# Altium PCB PCI_ASTROPIX_carrier_Bondplan.PcbDoc (part 1 of 2)
Units mm, origin at the board's own origin, x right, y up, seen from the top; angles counter-clockwise.
Board outline 51.3 x 59.63 mm, 4 copper layers (Top Layer, gnd, HV_vss, Bottom Layer); 70 components, 63 nets, 532 pads, 96 vias.
Unrouted connection lines stored in the file: 4.
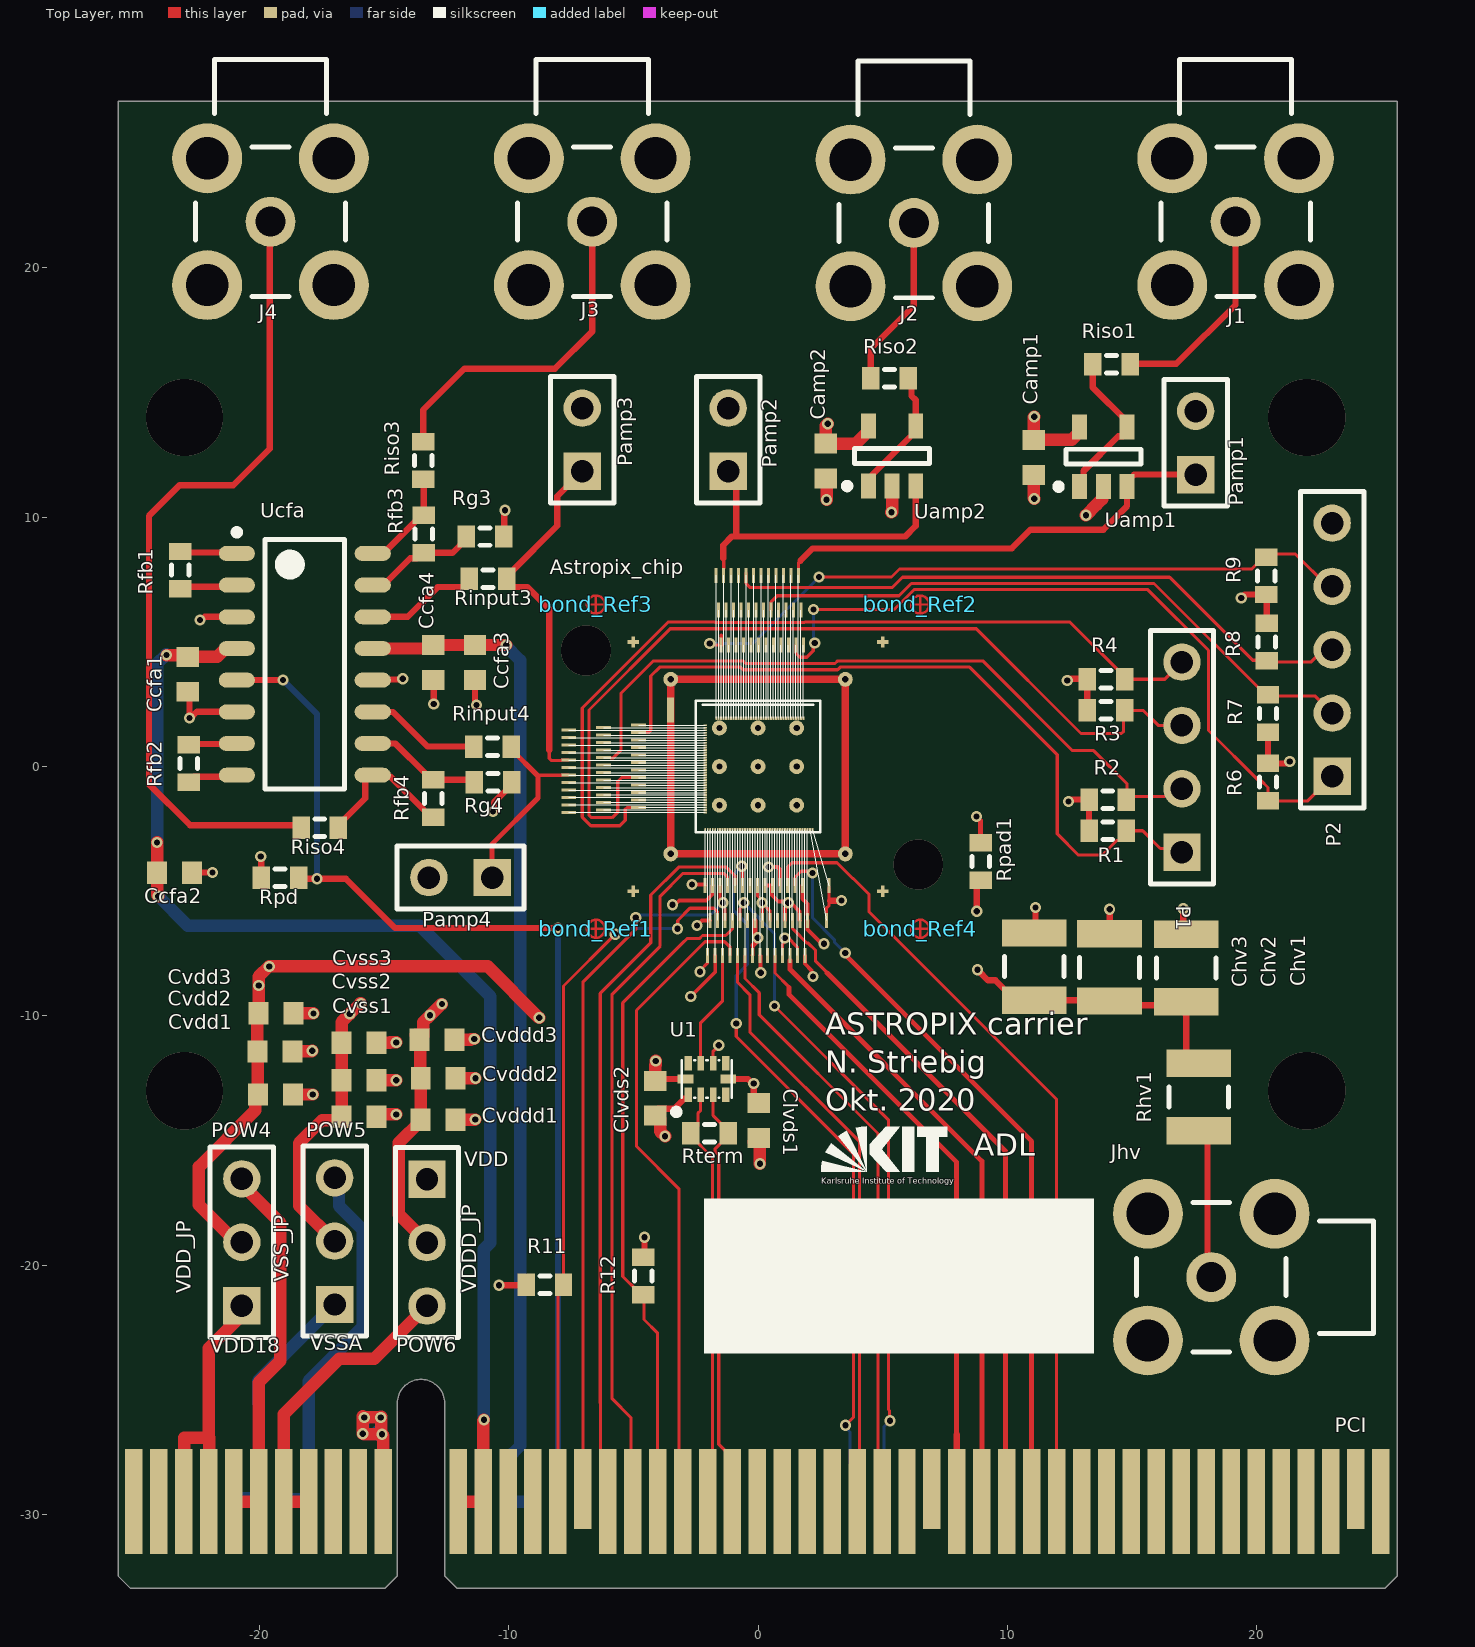
[diagram p0: Top Layer view]
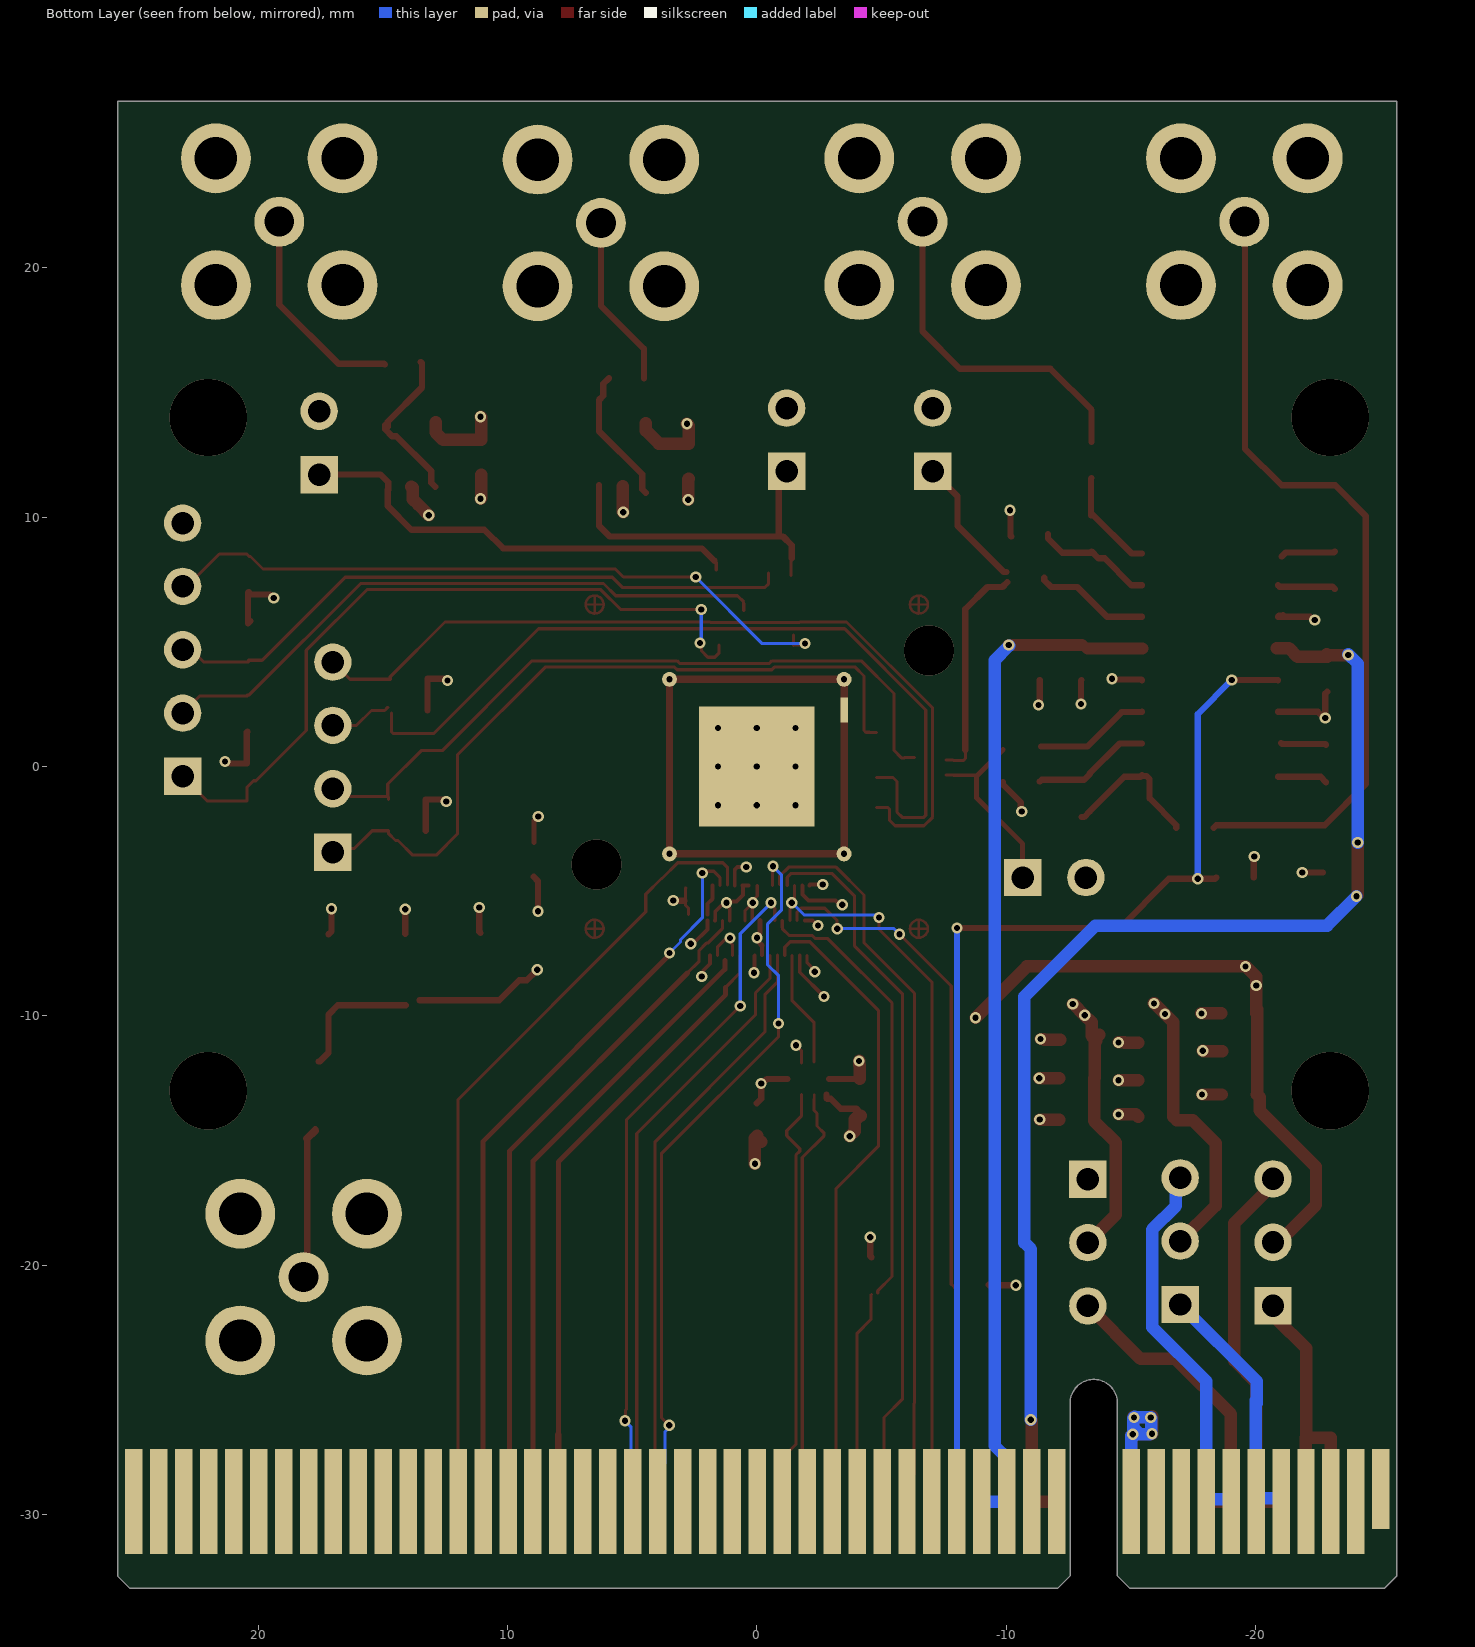
[diagram p1: Bottom Layer view, seen from below]
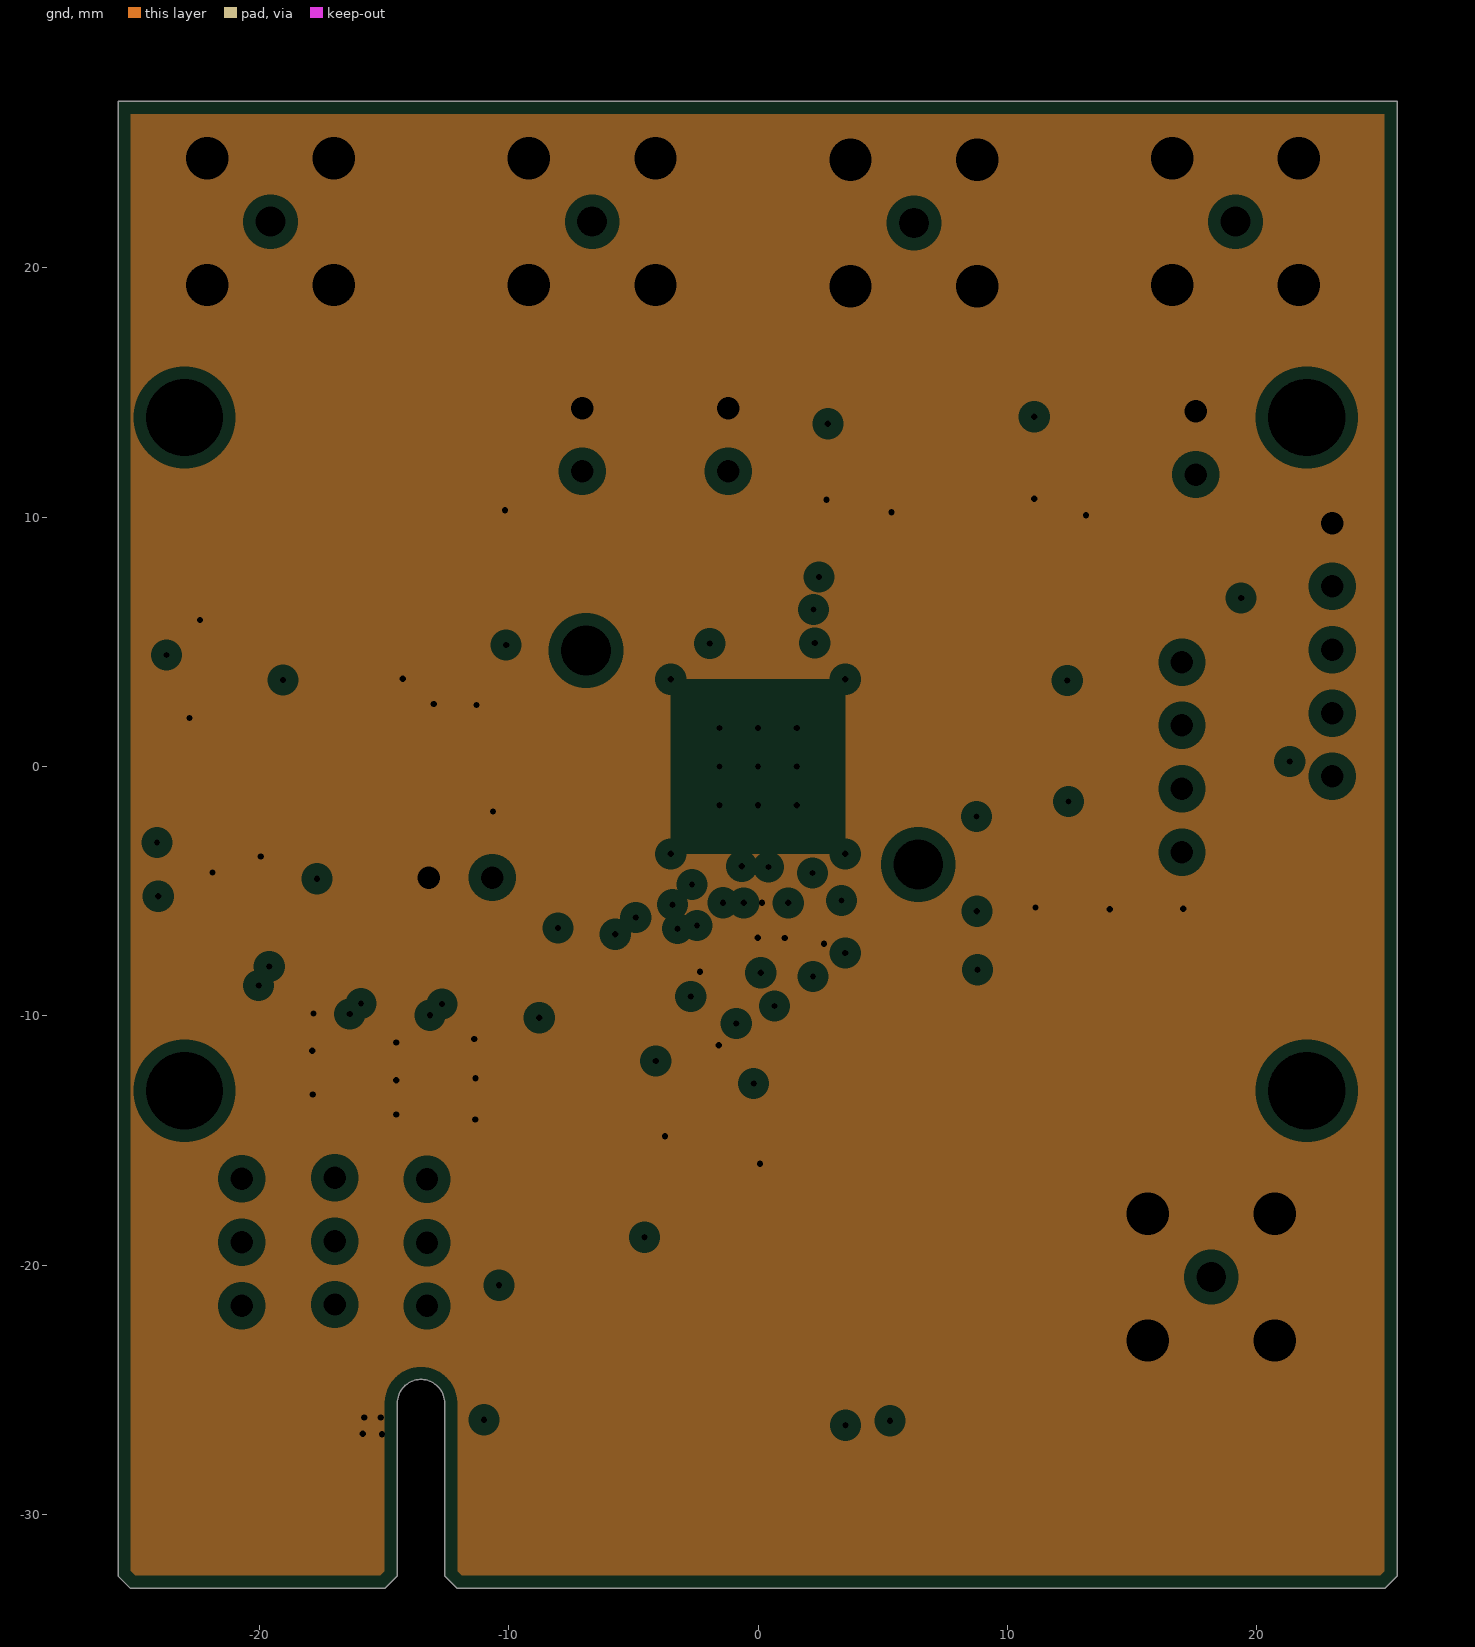
[diagram p2: gnd, clearances drawn from the general rule]
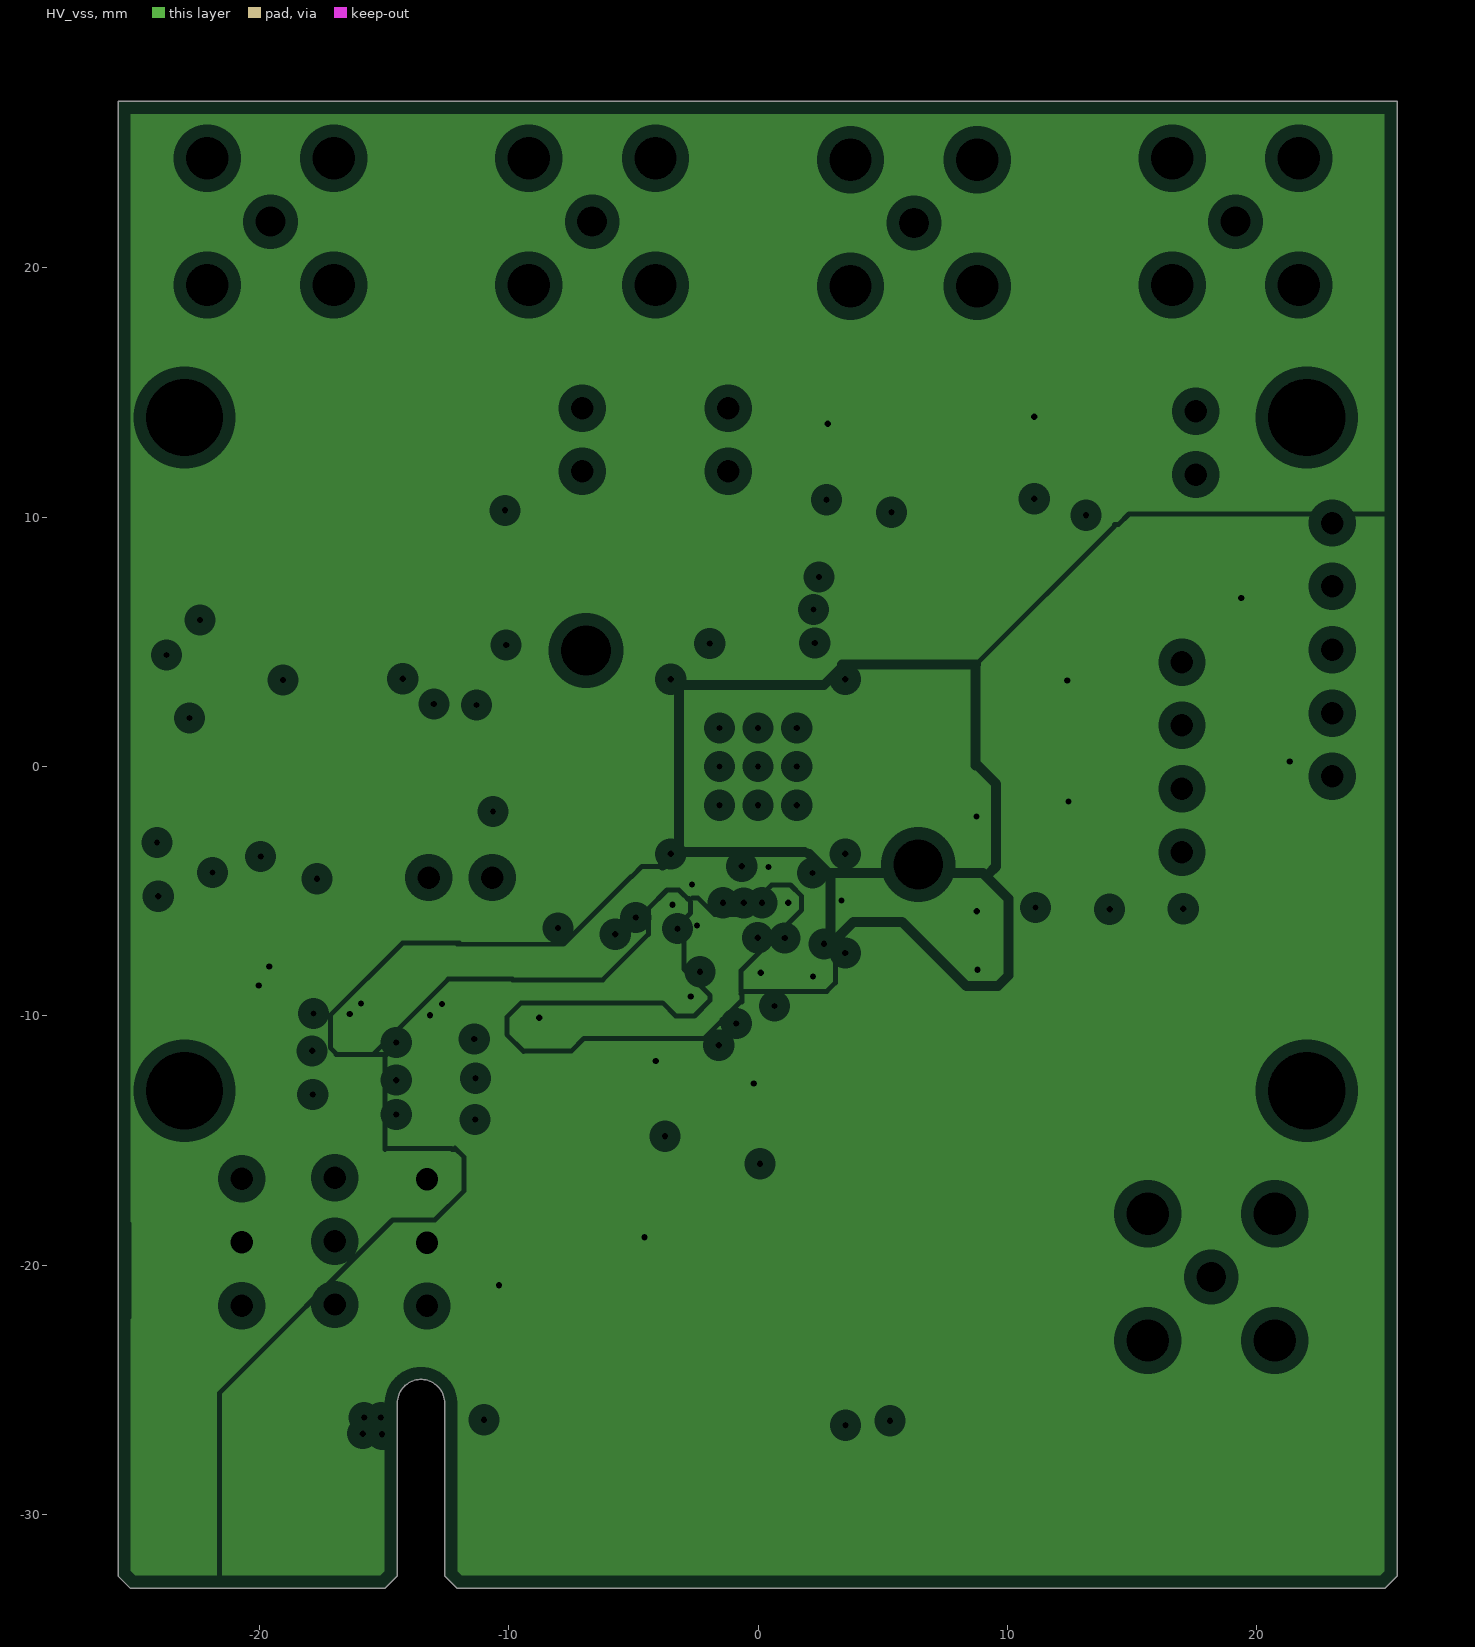
[diagram p3: HV_vss, clearances drawn from the general rule]

## Layer stack, top to bottom
Top Solder: solder mask 0.0102, Solder Resist, Dk 3.5
Top Layer: signal copper 0.0356
Dielectric 1: dielectric 0.32, FR-4, Dk 4.8
gnd: plane copper 0.0356, net gnd
Dielectric2: dielectric 0.32, FR-4, Dk 4.8
HV_vss: plane copper 0.0356, net (Multiple Nets)
Dielectric3: dielectric 0.32, FR-4, Dk 4.8
Bottom Layer: signal copper 0.0356
Bottom Solder: solder mask 0.0102, Solder Resist, Dk 3.5

## Board outline
-25.665,-32.456 -25.165,-32.956 -14.965,-32.956 -14.465,-32.456 -14.465,-25.527 cw(c-13.515,-25.527) -12.565,-25.527 -12.565,-32.456 -12.065,-32.956 25.135,-32.956 25.635,-32.456 25.635,-20.206 25.635,26.675 -25.665,26.675 -25.665,-22.031

## Design rules (kind name [scope] priority, off if disabled: settings)
Clearance Clearance_hv [InNetClass('HV')] p1: gap=0.3 ignorepadtopadclearanceinfootprint=FALSE except(0.5: Arc-Arc Arc-Track Track-Track)
Clearance Clearance_differentnet [All] p2: gap=0.125 ignorepadtopadclearanceinfootprint=FALSE except(0.17: SMDPad-SMDPad SMDPad-THPad SMDPad-Via THPad-THPad THPad-Via Via-Via)
Clearance Clearance_samenet [All] p3: gap=0.125 ignorepadtopadclearanceinfootprint=FALSE except(0: Arc-Fill Arc-Poly Arc-Region Track-Fill Track-Poly Track-Region SMDPad-Fill SMDPad-Poly SMDPad-Region THPad-Fill THPad-Poly THPad-Region Via-Fill Via-Poly Via-Region Fill-Fill Fill-Poly Fill-Region Poly-Poly Poly-Region Region-Region; 0.17: SMDPad-SMDPad SMDPad-THPad SMDPad-Via THPad-THPad THPad-Via Via-Via)
ComponentClearance [All] p1: gap=0 collisioncheckmode=3 verticalgap=0 showdistances=FALSE
DiffPairsRouting [InDifferentialPairClass('Horacios')] p1: maxlimit=0.15 minlimit=0.125 mostfreqgap=0.125 toplayer_minwidth=0.1 toplayer_maxwidth=0.15 toplayer_prefwidth=0.1 bottomlayer_minwidth=0.1 bottomlayer_maxwidth=0.15 bottomlayer_prefwidth=0.1 maxuncoupledlength=0.5
FabricationTestPointUsage FabricationTestPointUsage_1 [All] p1: valid=0 allowmultiple=FALSE
FabricationTestpoint FabricationTestpoint_1 [All] p1: side=3 testpointundercomponent=TRUE minsize=1.016 maxsize=2.54 preferedsize=1.524 minholesize=0 maxholesize=1.016 preferedholesize=0.813 testpointgrid=0.025 allowsidetop=TRUE allowsidebottom=TRUE usegrid=TRUE gridtolerance=0
HoleSize [All] p1: absolutevalues=TRUE maxlimit=6 minlimit=0.3 maxpercent=80.000 minpercent=20.000
HoleSize FabricationTestpoint [All] p2 off: absolutevalues=TRUE maxlimit=2.54 minlimit=0.025 maxpercent=80.000 minpercent=20.000
HoleSize FabricationTestPointUsage [All] p3 off: absolutevalues=TRUE maxlimit=2.54 minlimit=0.025 maxpercent=80.000 minpercent=20.000
MatchedLengths MatchedLengths_Within_diff [All] p1: tolerance=0.02 checknetsindiffpair=TRUE checkdiffpairvsdiffpair=FALSE checkxsignals=FALSE checkothers=FALSE
MatchedLengths MatchedLengths_all_diff [InDifferentialPairClass('FMC_LAxx')] p2: tolerance=0.1 checknetsindiffpair=FALSE checkdiffpairvsdiffpair=TRUE checkxsignals=TRUE checkothers=TRUE
MinimumAnnularRing [All] p1: minimumring=0.254
PlaneClearance [All] p1: clearance=0.5
PlaneConnect [All] p1: planeconnectstyle=Direct reliefexpansion=0.4 reliefentries=4 reliefconductorwidth=0.15 reliefairgap=0.15
PolygonConnect [All] p1: connectstyle=Relief reliefconductorwidth=0.15 reliefentries=4 polygonreliefangle="90 Angle" airgapwidth=0.254
RoomDefinition PCI_ASTROPIX_carrier [InComponentClass('PCI_ASTROPIX_carrier')] p1: confinementstyle=ConfineIn formatcopy=TRUE lockcomponents=FALSE outline 26.779,-31.537 97.382,-31.537 97.382,-4.325 26.779,-4.325
RoutingCorners [All] p1: cornerstyle=45-Degree minsetback=1.25 maxsetback=1.25
RoutingLayers [InNetClass('All Nets')] p1: top layer_v5=TRUE bottom layer_v5=TRUE
RoutingVias [All] p1: holewidth=0.25 width=0.45 viastyle="Through Hole" minholewidth=0.25 minwidth=0.45 maxholewidth=0.45 maxwidth=0.75
SilkToSilkClearance [All] p1 off: silktosilkclearance=0.254
SolderMaskExpansion [All] p1: expansion=0.075 istentingtop=FALSE
Width Width_Analog [InNetClass('Analog')] p1: maxlimit=0.254 minlimit=0.125 preferedwidth=0.2 minimp=50.000000 maximp=50.000000 favimp=50.000000
Width Width_Power [InNetClass('Power')] p2: maxlimit=10 minlimit=0.125 preferedwidth=0.25 minimp=50.000000 maximp=50.000000 favimp=50.000000
Width [InNetClass('All Nets')] p3: maxlimit=0.254 minlimit=0.125 preferedwidth=0.125
20 further rules are at their usual default settings.

## Classes and differential pairs
differential pair class Diffpair: SAMPLE_CLK
net class Power: gnd POW4 POW5 POW6 vcfa_neg vcfa_pos VDD18 vdd_board vddd_board vss_board VSSA
net class HV: NetAstropix_chip_201 sub_board
net class Analog: DAC_blpix DAC_VCasc2 DAC_Vminuspix DAC_Vth
differential pair SAMPLE_CLK: +SAMPLE_CLK_P -SAMPLE_CLK_N

## Components (designator, comment, footprint, x,y, rotation, side; value= is the part's Value field where it differs from the comment)
Astropix_chip "Comment" Astropix_Chip_w_bondpads_1mm_distance_125u_bondplan 0,0 r0 top
bond_Ref1 "AimStar" AimStar -6.5,-6.5 r90 top locked
bond_Ref2 "AimStar" AimStar 6.5,6.5 r90 top locked
bond_Ref3 "AimStar" AimStar -6.5,6.5 r90 top locked
bond_Ref4 "AimStar" AimStar 6.5,-6.5 r90 top locked
Camp1 "Cap Semi" 1608[0603] 11.05,12.4 r90 top value=100nF
Camp2 "Cap Semi" 1608[0603] 2.725,12.25 r90 top value=100nF
Ccfa1 "Cap Semi" 1608[0603] -22.875,3.7 r90 top value=4.7uF
Ccfa2 "Cap Semi" 1608[0603] -23.4,-4.25 r180 top value=100nF
Ccfa3 "Cap Semi" 1608[0603] -11.35,4.175 r90 top value=4.7uF
Ccfa4 "Cap Semi" 1608[0603] -13.025,4.175 r90 top value=100nF
Chv1 "Cap Semi" C1210 17.175,-8.075 r270 top value=100pF
Chv2 "Cap Semi" C1210 14.1,-8.05 r270 top value=100pF
Chv3 "Cap Semi" C1210 11.075,-8.025 r270 top value=100pF
Clvds1 "Cap Semi" 1608[0603] 0.025,-14.2 r90 top value=100nF
Clvds2 "Cap Semi" 1608[0603] -4.125,-13.3 r90 top value=100nF
Cvdd1 "Cap Semi" 1608[0603] -19.35,-13.15 r180 top value=100pF
Cvdd2 "Cap Semi" 1608[0603] -19.375,-11.425 r180 top value=100pF
Cvdd3 "Cap Semi" 1608[0603] -19.325,-9.9 r180 top value=100pF
Cvddd1 "Cap Semi" 1608[0603] -12.838,-14.171 r180 top value=100pF
Cvddd2 "Cap Semi" 1608[0603] -12.825,-12.5 r180 top value=100pF
Cvddd3 "Cap Semi" 1608[0603] -12.875,-10.95 r180 top value=100pF
Cvss1 "Cap Semi" 1608[0603] -16,-14.05 r180 top value=100pF
Cvss2 "Cap Semi" 1608[0603] -16,-12.575 r180 top value=100pF
Cvss3 "Cap Semi" 1608[0603] -16,-11.075 r180 top value=100pF
J1 "COAX-F" MCX5.08-H5 19.15,21.85 r270 top
J2 "COAX-F" MCX5.08-H5 6.25,21.8 r270 top
J3 "COAX-F" MCX5.08-H5 -6.65,21.85 r270 top
J4 "COAX-F" MCX5.08-H5 -19.55,21.85 r270 top
Jhv "COAX-F" MCX5.08-H5 18.175,-20.475 r180 top
P1 "Header 4" HDR1X4 17,-3.43 r90 top
P2 "Header 5" HDR1X5 23.025,-0.395 r90 top
Pamp1 "Header 2" HDR1X2 17.55,11.71 r90 top
Pamp2 "Header 2" HDR1X2 -1.2,11.835 r90 top
Pamp3 "Header 2" HDR1X2 -7.05,11.835 r90 top
Pamp4 "Header 2" HDR1X2 -10.66,-4.45 r180 top
PCI "PCI_custom_98_GECCO" PCI_for_PCB_98 -1.011,-29.094 r0 top
R1 "Res3" J1-0603 14.025,-2.575 r180 top value=10K
R2 "Res3" J1-0603 14.025,-1.325 r180 top value=10K
R3 "Res3" J1-0603 13.95,2.25 r180 top value=10K
R4 "Res3" J1-0603 13.95,3.5 r180 top value=10K
R6 "Res3" J1-0603 20.45,-0.625 r90 top value=10K
R7 "Res3" J1-0603 20.45,2.125 r270 top value=10K
R8 "Res3" J1-0603 20.4,5 r90 top value=10K
R9 "Res3" J1-0603 20.375,7.65 r270 top value=10K
R11 "Res3" J1-0603 -8.55,-20.775 r180 top value=10K
R12 "Res3" J1-0603 -4.6,-20.425 r90 top value=10K
Rfb1 "Res3" J1-0603 -23.175,7.875 r270 top value=1k
Rfb2 "Res3" J1-0603 -22.825,0.125 r90 top value=1k
Rfb3 "Res3" J1-0603 -13.4,9.325 r90 top value=1k
Rfb4 "Res3" J1-0603 -13.025,-1.275 r90 top value=1k
Rg3 "Res3" J1-0603 -10.95,9.225 r180 top value=493
Rg4 "Res3" J1-0603 -10.625,-0.625 r180 top value=493
Rhv1 "Res3" 14-1210 17.675,-13.25 r270 top value=1k
Rinput3 "Res3" J1-0603 -10.825,7.525 r180 top value=1k
Rinput4 "Res3" J1-0603 -10.65,0.8 r180 top value=1k
Riso1 "Res3" J1-0603 14.175,16.125 r0 top value=47
Riso2 "Res3" J1-0603 5.275,15.575 r180 top value=47
Riso3 "Res3" J1-0603 -13.425,12.275 r90 top value=100
Riso4 "Res3" J1-0603 -17.575,-2.45 r180 top value=100
Rpad1 "Res3" J1-0603 8.925,-3.8 r90 top value=1K
Rpd "Res3" J1-0603 -19.175,-4.45 r180 top value=10k
Rterm "Res3" J1-0603 -1.95,-14.7 r180 top value=100
U1 "SN65LVDS4" SN65LVDS4RSER -2.05,-12.525 r0 top
Uamp1 "OPA320" SOT95P245X110-5N 13.85,12.425 r90 top
Uamp2 "OPA320" SOT95P245X110-5N 5.375,12.45 r90 top
Ucfa "AD8024" SOIC127P600X265-16N -18.175,4.1 r0 top
VDD_JP "Header 3" HDR1X3 -20.7,-21.615 r90 top
VDDD_JP "Header 3" HDR1X3 -13.275,-16.55 r270 top
VSS_JP "Header 3" HDR1X3 -16.979,-21.572 r90 top

## Footprints (in the part's own frame and the unit in brackets; to place one, negate y for a bottom-side part, rotate by r counter-clockwise, add the part's x,y. Pads: shape width x height; smd on the part's side, far side on the other; paste and mask are expansions set on the pad)
14-1210 [mm] "Chip Resistor, Body 3.2x2.5mm, IPC High Density"
  rect 1.1x2.6 smd: 1(-1.35,0) 2(1.35,0)
  silkscreen extent -0.4,-1.2 0.4,1.2, body extent -1.68,-1.32 1.68,1.32, height 0.9
1608[0603] [mm] "Chip Capacitor, Body 1.6x0.8mm, IPC High Density"
  rect 0.8x0.9 smd: 1(-0.7,0) 2(0.7,0)
  body extent -0.87,-0.48 0.87,0.48, height 1.3
AimStar [mm]
  Top Layer circle w0.1: c-0.004,0 r0.36
  Top Layer lines w0.1: -0.004,0.35 0,-0.35 ; -0.35,0 0.35,0
Astropix_Chip_w_bondpads_1mm_distance_125u_bondplan [mm]
  rect 0.125x0.6 smd mask+0.075: 1(-2.12,-4.77) 2(-2.02,-7.57) 3(-1.92,-6.17) 4(-1.82,-4.77) 5(-1.72,-7.57) 6(-1.62,-6.17) 7(-1.52,-4.77) 8(-1.42,-7.57) 9(-1.32,-6.17) 10(-1.22,-4.77) 11(-1.12,-7.57) 12(-1.02,-6.17) 13(-0.92,-4.77) 14(-0.82,-7.57) 15(-0.72,-6.17) 16(-0.62,-4.77) 17(-0.52,-7.57) 18(-0.42,-6.17) 19(-0.32,-4.77) 20(-0.22,-7.57) 21(-0.12,-6.17) 22(-0.02,-4.77) 23(0.08,-7.57) 24(0.18,-6.17) 25(0.28,-4.77) 26(0.38,-7.57) 27(0.48,-6.17) 28(0.58,-4.77) 29(0.68,-7.57) 30(0.78,-6.17) 31(0.88,-4.77) 32(0.98,-7.57) 33(1.08,-6.17) 34(1.18,-4.77) 35(1.28,-7.57) 36(1.38,-6.17) 37(1.48,-4.77) 38(1.58,-7.57) 39(1.68,-6.17) 40(1.78,-4.77) 41(1.88,-7.57) 42(1.98,-6.17) 43(2.84,-4.77) 44(2.74,-6.17) 81(1.82,4.87) 82(1.72,6.27) 83(1.62,7.67) 84(1.52,4.87) 85(1.42,6.27) 86(1.32,7.67) 87(1.22,4.87) 88(1.12,6.27) 89(1.02,7.67) 90(0.92,4.87) 91(0.82,6.27) 92(0.72,7.67) 93(0.62,4.87) 94(0.52,6.27) 95(0.42,7.67) 96(0.32,4.87) 97(0.22,6.27) 98(0.12,7.67) 99(0.02,4.87) 100(-0.08,6.27) 101(-0.18,7.67) 102(-0.28,4.87) 103(-0.38,6.27) 104(-0.48,7.67) 105(-0.58,4.87) 106(-0.68,6.27) 107(-0.78,7.67) 108(-0.88,4.87) 109(-0.98,6.27) 110(-1.08,7.67) 111(-1.18,4.87) 112(-1.28,6.27) 113(-1.38,7.67) 114(-1.48,4.87) 115(-1.58,6.27) 116(-1.68,7.67)
  rect 0.3x1 all layers, no hole mask+0: 2(-3.51,2.27)
  rect 0.6x0.125 smd mask+0.075: 45(-7.59,-1.84) 46(-6.19,-1.74) 47(-4.79,-1.64) 48(-7.59,-1.54) 49(-6.19,-1.44) 50(-4.79,-1.34) 51(-7.59,-1.24) 52(-6.19,-1.14) 53(-4.79,-1.04) 54(-7.59,-0.94) 55(-6.19,-0.84) 56(-4.79,-0.74) 57(-7.59,-0.64) 58(-6.19,-0.54) 59(-4.79,-0.44) 60(-7.59,-0.34) 61(-6.19,-0.24) 62(-4.79,-0.14) 63(-7.59,-0.04) 64(-6.19,0.06) 65(-4.79,0.16) 66(-7.59,0.26) 67(-6.19,0.36) 68(-4.79,0.46) 69(-7.59,0.56) 70(-6.19,0.66) 71(-4.79,0.76) 72(-7.59,0.86) 73(-6.19,0.96) 74(-4.79,1.06) 75(-7.59,1.16) 76(-6.19,1.26) 77(-4.79,1.36) 78(-7.59,1.46) 79(-6.19,1.56) 80(-4.79,1.66)
  round 0.6 hole 0.25: 201(-1.55,-1.55) 201(-1.55,0) 201(-1.55,1.55) 201(0,-1.55) 201(0,0) 201(0,1.55) 201(1.55,-1.55) 201(1.55,0) 201(1.55,1.55) 202(-3.5,-3.5) 202(-3.5,3.5) 202(3.5,-3.5) 202(3.5,3.5)
  rect 4.63x4.82 smd far side: 201(0,0)
  rect 0.07x0.14 smd mask+0.015: NC(-2.12,-2.53) NC(-2.02,-2.53) NC(-1.92,-2.53) NC(-1.82,-2.53) NC(-1.72,-2.53) NC(-1.68,1.94) NC(-1.62,-2.53) NC(-1.58,1.94) NC(-1.52,-2.53) NC(-1.48,1.94) NC(-1.42,-2.53) NC(-1.38,1.94) NC(-1.32,-2.53) NC(-1.28,1.94) NC(-1.22,-2.53) NC(-1.18,1.94) NC(-1.12,-2.53) NC(-1.08,1.94) NC(-1.02,-2.53) NC(-0.98,1.94) NC(-0.92,-2.53) NC(-0.88,1.94) NC(-0.82,-2.53) NC(-0.78,1.94) NC(-0.72,-2.53) NC(-0.68,1.94) NC(-0.62,-2.53) NC(-0.58,1.94) NC(-0.52,-2.53) NC(-0.48,1.94) NC(-0.42,-2.53) NC(-0.38,1.94) NC(-0.32,-2.53) NC(-0.28,1.94) NC(-0.22,-2.53) NC(-0.18,1.94) NC(-0.12,-2.53) NC(-0.08,1.94) NC(-0.02,-2.53) NC(0.02,1.94) NC(0.08,-2.53) NC(0.12,1.94) NC(0.18,-2.53) NC(0.22,1.94) NC(0.28,-2.53) NC(0.32,1.94) NC(0.38,-2.53) NC(0.42,1.94) NC(0.48,-2.53) NC(0.52,1.94) NC(0.58,-2.53) NC(0.62,1.94) NC(0.68,-2.53) NC(0.72,1.94) NC(0.78,-2.53) NC(0.82,1.94) NC(0.88,-2.53) NC(0.92,1.94) NC(0.98,-2.53) NC(1.02,1.94) NC(1.08,-2.53) NC(1.12,1.94) NC(1.18,-2.53) NC(1.22,1.94) NC(1.28,-2.53) NC(1.32,1.94) NC(1.38,-2.53) NC(1.42,1.94) NC(1.48,-2.53) NC(1.52,1.94) NC(1.58,-2.53) NC(1.62,1.94) NC(1.68,-2.53) NC(1.72,1.94) NC(1.78,-2.53) NC(1.82,1.94) NC(1.88,-2.53) NC(1.98,-2.53) NC(2.08,-2.53) NC(2.18,-2.53)
  rect 0.14x0.07 smd mask+0.015: NC(-2.11,-1.84) NC(-2.11,-1.74) NC(-2.11,-1.64) NC(-2.11,-1.54) NC(-2.11,-1.44) NC(-2.11,-1.34) NC(-2.11,-1.24) NC(-2.11,-1.14) NC(-2.11,-1.04) NC(-2.11,-0.94) NC(-2.11,-0.84) NC(-2.11,-0.74) NC(-2.11,-0.64) NC(-2.11,-0.54) NC(-2.11,-0.44) NC(-2.11,-0.34) NC(-2.11,-0.24) NC(-2.11,-0.14) NC(-2.11,-0.04) NC(-2.11,0.06) NC(-2.11,0.16) NC(-2.11,0.26) NC(-2.11,0.36) NC(-2.11,0.46) NC(-2.11,0.56) NC(-2.11,0.66) NC(-2.11,0.76) NC(-2.11,0.86) NC(-2.11,0.96) NC(-2.11,1.06) NC(-2.11,1.16) NC(-2.11,1.26) NC(-2.11,1.36) NC(-2.11,1.46) NC(-2.11,1.56) NC(-2.11,1.66)
  rect 0.15x0.45 smd: p(-5,-5) p(-5,5) p(5,-5) p(5,5)
  rect 0.45x0.15 smd: p(-5,-5) p(-5,5) p(5,-5) p(5,5)
  Top Layer lines w0.3: -3.5,-3.5 -3.5,3.5 3.5,3.5 3.5,-3.5 -3.5,-3.5
  silkscreen extent -7.59,-7.57 2.84,7.67
C1210 [mm] "Chip Capacitor, Body 3.2x2.5mm, IPC High Density"
  rect 1.1x2.6 smd: 1(-1.35,0) 2(1.35,0)
  silkscreen extent -0.4,-1.2 0.4,1.2, body extent -1.7,-1.35 1.7,1.35, height 1.3
HDR1X2 [mm] "Connector; Header; 2 Position"
  rect 1.5x1.5 hole 0.9: 1(0,0)
  round 1.5 hole 0.9: 2(2.54,0)
  silkscreen extent -1.27,-1.27 3.81,1.27
HDR1X3 [mm] "Connector; Header; 3 Position"
  rect 1.5x1.5 hole 0.9: 1(0,0)
  round 1.5 hole 0.9: 2(2.54,0) 3(5.08,0)
  silkscreen extent -1.27,-1.27 6.35,1.27
HDR1X4 [mm] "Connector; Header; 4 Position"
  rect 1.5x1.5 hole 0.9: 1(0,0)
  round 1.5 hole 0.9: 2(2.54,0) 3(5.08,0) 4(7.62,0)
  silkscreen extent -1.27,-1.27 8.89,1.27
HDR1X5 [mm] "Connector; Header; 5 Position"
  rect 1.5x1.5 hole 0.9: 1(0,0)
  round 1.5 hole 0.9: 2(2.54,0) 3(5.08,0) 4(7.62,0) 5(10.16,0)
  silkscreen extent -1.27,-1.27 11.43,1.27
J1-0603 [mm] "Chip Resistor, Body 1.6x0.8mm, IPC High Density"
  rect 0.7x0.9 smd: 1(-0.75,0) 2(0.75,0)
  silkscreen extent -0.2,-0.35 0.2,0.35, body extent -0.85,-0.48 0.85,0.48, height 0.9
MCX5.08-H5 [mm] "Connector; RF Coaxial, MCX, Thru-Hole; 5 Position; Right-Angle"
  round 2 hole 1.2: 1(0,0)
  round 2.8 hole 1.7: 2(-2.54,-2.54) 3(2.54,-2.54) 4(2.54,2.54) 5(-2.54,2.54)
  silkscreen extent -6.5,-3 3,3
PCI_for_PCB_98 [mm]
  rect 0.7x3.2 smd far side: A1(-24.014,0.119)
  rect 0.7x4.2 smd far side: A2(-23.014,-0.381) A3(-22.014,-0.381) A4(-21.014,-0.381) A5(-20.014,-0.381) A6(-19.014,-0.381) A7(-18.014,-0.381) A8(-17.014,-0.381) A9(-16.014,-0.381) A10(-15.014,-0.381) A11(-14.014,-0.381) A12(-11.014,-0.381) A13(-10.014,-0.381) A14(-9.014,-0.381) A15(-8.014,-0.381) A16(-7.014,-0.381) A17(-6.014,-0.381) A18(-5.014,-0.381) A19(-4.014,-0.381) A20(-3.014,-0.381) A21(-2.014,-0.381) A22(-1.014,-0.381) A23(-0.014,-0.381) A24(0.986,-0.381) A25(1.986,-0.381) A26(2.986,-0.381) A27(3.986,-0.381) A28(4.986,-0.381) A29(5.986,-0.381) A30(6.986,-0.381) A31(7.986,-0.381) A32(8.986,-0.381) A33(9.986,-0.381) A34(10.986,-0.381) A35(11.986,-0.381) A36(12.986,-0.381) A37(13.986,-0.381) A38(14.986,-0.381) A39(15.986,-0.381) A40(16.986,-0.381) A41(17.986,-0.381) A42(18.986,-0.381) A43(19.986,-0.381) A44(20.986,-0.381) A45(21.986,-0.381) A46(22.986,-0.381) A47(23.986,-0.381) A48(24.986,-0.381) A49(25.986,-0.381)
  rect 0.7x4.2 smd: B1(-24.014,-0.381) B2(-23.014,-0.381) B3(-22.014,-0.381) B4(-21.014,-0.381) B5(-20.014,-0.381) B6(-19.014,-0.381) B7(-18.014,-0.381) B8(-17.014,-0.381) B9(-16.014,-0.381) B10(-15.014,-0.381) B11(-14.014,-0.381) B12(-11.014,-0.381) B13(-10.014,-0.381) B14(-9.014,-0.381) B15(-8.014,-0.381) B16(-7.014,-0.381) B18(-5.014,-0.381) B19(-4.014,-0.381) B20(-3.014,-0.381) B21(-2.014,-0.381) B22(-1.014,-0.381) B23(-0.014,-0.381) B24(0.986,-0.381) B25(1.986,-0.381) B26(2.986,-0.381) B27(3.986,-0.381) B28(4.986,-0.381) B29(5.986,-0.381) B30(6.986,-0.381) B32(8.986,-0.381) B33(9.986,-0.381) B34(10.986,-0.381) B35(11.986,-0.381) B36(12.986,-0.381) B37(13.986,-0.381) B38(14.986,-0.381) B39(15.986,-0.381) B40(16.986,-0.381) B41(17.986,-0.381) B42(18.986,-0.381) B43(19.986,-0.381) B44(20.986,-0.381) B45(21.986,-0.381) B46(22.986,-0.381) B47(23.986,-0.381) B49(25.986,-0.381)
  rect 0.7x3.2 smd: B17(-6.014,0.119) B31(7.986,0.119) B48(24.986,0.119)
SN65LVDS4RSER [mm] "SN65LVDS4  1.8-V High-Speed  Differential  Line Receiver"
  rect 0.3x0.58 smd mask+0.05: 1(-0.75,-0.635) 4(0.75,-0.635) 6(0.75,0.635) 9(-0.75,0.635)
  rect 0.25x0.58 smd mask+0.05: 2(-0.25,-0.635) 3(0.25,-0.635) 7(0.25,0.635) 8(-0.25,0.635)
  rect 0.63x0.35 smd mask+0.05: 5(0.86,0) 10(-0.86,0)
  silkscreen extent -1.35,-1.45 1,0.75
SOIC127P600X265-16N [mm] "SOIC, 16-Leads, Body 9,90x3,90mm, Pitch 1,27mm, IPC Medium Density"
  oval 1.45x0.6 smd: 1(-2.725,4.445) 2(-2.725,3.175) 3(-2.725,1.905) 4(-2.725,0.635) 5(-2.725,-0.635) 6(-2.725,-1.905) 7(-2.725,-3.175) 8(-2.725,-4.445) 9(2.725,-4.445) 10(2.725,-3.175) 11(2.725,-1.905) 12(2.725,-0.635) 13(2.725,0.635) 14(2.725,1.905) 15(2.725,3.175) 16(2.725,4.445)
  silkscreen extent -2.85,-5 1.6,5.42, body extent -2,-5 2,5, height 2.65
SOT95P245X110-5N [mm] "SOT23, 5-Leads, Body 2,90x2,45mm, Pitch 0,95mm, IPC Medium Density"
  rect 1x0.6 smd: 1(-1.2,0.95) 2(-1.2,0) 3(-1.2,-0.95) 4(1.2,-0.95) 5(1.2,0.95)
  silkscreen extent -1.32,-1.5 0.3,1.92, body extent -0.7,-1.5 0.7,1.5, height 1.1

## Part data
Camp1 Camp2 Ccfa1 Ccfa2 Ccfa3 Ccfa4 Chv1 Chv2 Chv3 Clvds1 Clvds2 Cvdd1 Cvdd2 Cvdd3 Cvddd1 Cvddd2 Cvddd3 Cvss1 Cvss2 Cvss3: "Capacitor (Semiconductor SIM Model)", LatestRevisionDate=29-May-2009, LatestRevisionNote="IPC-7351 Footprint Added.", PackageDescription="Chip Capacitor", PackageReference=C1206, Published=8-Jun-2000, Publisher="Altium Limited"
J1 J2 J3 J4 Jhv: "RF Coaxial PCB Connector, MCX; Thru-Hole, Right-Angle Mount Socket, Blunt Post Terminal, 50 Ohm Impedance", PackageDocument=04-Jul-1999, ComponentLink1Description="Manufacturer Link", ComponentLink1URL=http://www.amphenolrf.com/, DatasheetDocument=30-May-2003, DrillSize="Corresponds to nominal value.", LatestRevisionDate=15-Jul-2004, LatestRevisionNote="Component Replaced.", PackageReference=919-119J-51AX, PCB_Layout="Complies with manufacturer's recommendation.", Published=15-Jul-2004, Publisher="Altium Limited"
P1: "Header, 4-Pin", LatestRevisionDate=17-Jul-2002, LatestRevisionNote="Re-released for DXP Platform.", Publisher="Altium Limited"
P2: "Header, 5-Pin", LatestRevisionDate=17-Jul-2002, LatestRevisionNote="Re-released for DXP Platform.", Publisher="Altium Limited"
Pamp1 Pamp2 Pamp3 Pamp4: "Header, 2-Pin", LatestRevisionDate=17-Jul-2002, LatestRevisionNote="Re-released for DXP Platform.", Publisher="Altium Limited"
R1 R2 R3 R4 R6 R7 R8 R9 R11 R12 Rfb1 Rfb2 Rfb3 Rfb4 Rg3 Rg4 Rhv1 Rinput3 Rinput4 Riso1 Riso2 Riso3 Riso4 Rpad1 Rpd Rterm: "Resistor", LatestRevisionDate=29-May-2009, LatestRevisionNote="IPC-7351 Footprint Added.", PackageDescription="Chip Resistor", PackageReference=J1-0603, Published=8-Jun-2000, Publisher="Altium Limited"
U1: "1.8-V High-Speed  Differential  Line Receiver"
VDD_JP VDDD_JP VSS_JP: "Header, 3-Pin", LatestRevisionDate=17-Jul-2002, LatestRevisionNote="Re-released for DXP Platform.", Publisher="Altium Limited"

## Via types
v1: diameter 0.45, hole 0.25, Top Layer to Bottom Layer, 90 vias
v2: diameter 3.1, hole 3.1, Top Layer to Bottom Layer, 4 vias
v3: diameter 2, hole 2, Top Layer to Bottom Layer, 2 vias

## Nets (pads, with @x,y where several pads share a name; then routed paths per layer and width w, separated by ;. In a path a pad name is that pad's centre, name@x,y a point inside that pad or via, vN(x,y) a via of type N, cw(c..) or ccw(c..) an arc to the next point about the centre after c; other vN are vias at no path point)
Amp1: Pamp1.1 Uamp1.3 | length 18.3
  Top Layer w0.125: 1.625,7.875 1.625,8.177 1.698,8.25
  Top Layer w0.25: 1.698,8.25 2.198,8.75 10.175,8.75 10.925,9.5 13.85,9.5 14.8,10.45 Uamp1.3@14.8,11.1 ; Uamp1.3@14.775,11.1 14.775,11.4 15.085,11.71 Pamp1.1@17.55,11.71
Amp2: Pamp2.1 Uamp2.3 | length 13.6
  Top Layer w0.125: -1.4,8.35 -1.375,8.325 -1.375,7.949 -1.38,7.944 -1.38,7.67
  Top Layer w0.254: -1.4,8.35 -1.4,8.875 -1.05,9.225 -0.875,9.225 ; Pamp2.1@-1.2,11.85 -0.875,11.525 -0.875,9.225 ; Uamp2.3@6.325,11.275 Uamp2.3@6.325,11.25 6.325,9.65 5.9,9.225 -0.875,9.225
Amp3: Pamp3.1 Rinput3.1 | length 14.3
  Top Layer w0.125: -8.37,0.665 -8.37,0.323 -8.297,0.25 -7.884,0.25 -7.874,0.26 -7.6,0.26
  Top Layer w0.254: Rinput3.1@-10.045,7.395 -9.852,7.202 -9.252,7.202 -8.366,6.316 -8.366,0.668 -8.37,0.665 ; Rinput3.1@-10,7.8 -9.9,7.8 -8.048,9.652 -8.048,10.837 -7.075,11.81 Pamp3.1@-7.075,11.9
Amp4: Pamp4.1 Rinput4.1 | length 7.6
  Top Layer w0.125: -8.85,-0.35 -7.884,-0.35 -7.874,-0.34 -7.6,-0.34
  Top Layer w0.2: Pamp4.1@-10.66,-4.45 -10.66,-3.099 -8.82,-1.259 -8.82,-0.38 Rinput4.1@-9.875,0.675
DAC_blpix: PCI.B32 | length 24.6
  Top Layer w0.125: 0.68,-7.57 0.68,-8.28 1.25,-8.85
  Top Layer w0.2: 1.25,-8.85 1.25,-9.15 7.95,-15.85 7.95,-26.771 7.964,-26.786
  Top Layer w0.254: PCI.B32@7.964,-29.186 7.964,-26.786
DAC_VCasc2: PCI.B33 | length 23.9
  Top Layer w0.2: 1.28,-7.77 1.28,-8.13 8.975,-15.825 PCI.B33@8.975,-28.5
DAC_Vminuspix: PCI.B35 | length 30.2
  Top Layer w0.125: 1.48,-4.77 1.48,-4.442 1.722,-4.2 1.926,-4.2 v1@2.15,-4.2 ; v1(2.183,-4.27) 2.15,-4.237 v1@2.15,-4.2 ; v1@2.332,-4.2 v1@2.15,-4.2
  Top Layer w0.2: v1(3.5,-7.475) 3.5,-7.55 10.975,-15.025 PCI.B35@10.975,-29.475
  Bottom Layer w0.125: v1(2.183,-4.27) 2.183,-6.06 3.061,-6.938 3.061,-7.036 v1(3.5,-7.475)
DAC_Vth: PCI.B34 | length 26.9
  Top Layer w0.125: 1.38,-6.17 1.38,-6.498 1.43,-6.548 1.965,-7.082 2.02,-7.082 2.312,-7.375 2.312,-7.813 2.775,-8.275
  Top Layer w0.2: 2.775,-8.275 9.925,-15.425 9.925,-29.35 PCI.B34@10,-29.425
Disable_cfa: PCI.A16 Rpd.1 Ucfa.5 | length 44.6
  Top Layer w0.25: Ucfa.5@-20.9,3.465 -20.895,3.47 -19.055,3.47 v1(-19.05,3.475) ; Rpd.1@-18.425,-4.45 -18.375,-4.5 v1(-17.68,-4.5) -16.525,-4.5 -14.55,-6.475 v1(-8.025,-6.475)
  Bottom Layer w0.25: v1(-19.05,3.475) -17.68,2.105 v1(-17.68,-4.5) ; PCI.A16@-8.025,-29.475 v1(-8.025,-6.475)
gnd: Camp1.1 Camp2.1 Ccfa1.1 Ccfa2.1 Ccfa3.1 Ccfa4.1 Chv1.1 Chv2.1 Chv3.1 Clvds1.1 Clvds2.1 Cvdd1.1 Cvdd2.1 Cvdd3.1 Cvddd1.1 Cvddd2.1 Cvddd3.1 Cvss1.1 Cvss2.1 Cvss3.1 J1.2 J1.3 J1.4 J1.5 J2.2 J2.3 J2.4 J2.5 J3.2 J3.3 J3.4 J3.5 J4.2 J4.3 J4.4 J4.5 Jhv.2 Jhv.3 Jhv.4 Jhv.5 P2.5 Pamp1.2 Pamp2.2 Pamp3.2 Pamp4.2 PCI.A11 PCI.B11 Rg3.1 Rg4.1 Rpd.2 U1.1 U1.7 Uamp1.2 Uamp2.2 Ucfa.3 Ucfa.6 Ucfa.12 | length 52.2
  Top Layer w0.125: v1(-2.325,-8.225) -2.325,-8.175 -2.02,-7.87 -2.02,-7.57 ; U1.7@-1.8,-11.89 -1.8,-11.412 -1.575,-11.187 v1(-1.575,-11.175) ; -0.02,-4.77 -0.02,-5.193 0.15,-5.363 v1@0.15,-5.425 ; v1(0.163,-5.464) v1@0.18,-5.481 ; v1@0.175,-5.425 0.18,-5.43 v1@0.18,-5.464 ; 0.18,-6.17 v1@0.18,-5.481 ; 0.475,-6.2 0.475,-5.776 v1@0.18,-5.481 ; 0.98,-7.57 0.98,-7.137 1.148,-6.969 1.148,-6.881 1.081,-6.881 v1(1.075,-6.875) ; v1@1.15,-6.85 1.188,-6.85 1.58,-7.242 1.58,-7.57
  Top Layer w0.15: -0.22,-7.57 -0.208,-7.558 -0.208,-7.177 ; 1.78,-4.77 1.78,-5.305 1.98,-5.505 1.98,-5.945 ; 1.98,-6.17 1.98,-6.53 2.55,-7.1 2.649,-7.1 v1(2.649,-7.109)
  Top Layer w0.2: -0.208,-7.177 -0.06,-7.03 -0.06,-6.888 v1@-0.025,-6.853 ; -0.12,-6.17 -0.12,-6.69 -0.012,-6.797 v1(-0.012,-6.865)
  Top Layer w0.25: v1@-22.875,1.925 -22.771,1.925 -22.501,2.195 Ucfa.6@-20.9,2.195 ; Ccfa1.1@-22.875,3 -22.8,2.925 v1(-22.8,1.95) ; Ccfa2.1@-22.7,-4.25 -21.877,-4.25 v1(-21.874,-4.253) ; v1(-22.375,5.875) -22.321,5.875 -22.191,6.005 Ucfa.3@-21.08,6.005 ; Ucfa.3@-21.1,6.075 -21.037,6.013 Ucfa.3@-21.03,6.005 ; Ucfa.3@-21.075,6 Ucfa.3@-21.08,6.005 ; Ucfa.3@-20.975,6.05 -20.945,6.05 Ucfa.3@-20.9,6.005 Ucfa.3@-21.03,6.005 ; v1(-19.945,-3.605) -19.945,-3.614 -19.925,-3.634 Rpd.2@-19.925,-4.45 ; Ucfa.12@-15.45,3.465 -15.42,3.495 -14.28,3.495 v1(-14.25,3.525) ; Ccfa4.1@-13.025,3.475 -13,3.45 v1(-13,2.507) ; Ccfa3.1@-11.35,3.475 -11.35,2.527 v1(-11.292,2.469) ; v1(-10.625,-1.8) -10.587,-1.762 -10.587,-1.437 -9.875,-0.725 Rg4.1@-9.875,-0.625 ; Rg3.1@-10.2,9.225 -10.175,9.25 -10.175,10.25 v1(-10.15,10.275) ; Clvds2.1@-4.05,-13.775 -4,-13.725 -3.365,-13.725 -2.965,-13.325 -2.825,-13.325 -2.8,-13.3 U1.1@-2.8,-13.16 ; Chv3.1@11.075,-6.675 11.125,-6.625 v1(11.125,-5.65) ; Chv2.1@14.1,-6.7 v1(14.1,-5.725) ; v1(17.05,-5.7) 17.05,-6.6 Chv1.1@17.175,-6.725 ; Ucfa.3@-21.08,6.005 Ucfa.3@-21.03,6.005
  Top Layer w0.5: Cvdd2.1@-18.675,-11.425 -17.905,-11.425 v1(-17.88,-11.4) ; Cvdd1.1@-18.65,-13.15 v1(-17.855,-13.15) ; Cvdd3.1@-18.625,-9.9 v1(-17.83,-9.9) ; v1(-15.85,-26.75) v1@-15.85,-26.05 ; v1@-15.825,-26.75 -15.8,-26.775 v1@-15.1,-26.775 ; v1(-15.794,-26.098) -15.123,-26.098 v1@-15.1,-26.075 ; Cvss1.1@-15.3,-14.05 -15.2,-13.95 v1(-14.505,-13.95) ; Cvss2.1@-15.3,-12.575 v1(-14.505,-12.575) ; Cvss3.1@-15.3,-11.075 -14.76,-11.075 -14.746,-11.061 v1(-14.505,-11.061) ; v1(-15.125,-26.1) -15.1,-26.125 v1@-15.1,-26.775 ; v1@-15.1,-26.8 v1@-15.1,-26.775 ; PCI.B11@-15.025,-29.475 -15.025,-26.825 v1(-15.075,-26.775) v1@-15.1,-26.775 ; Cvddd3.1@-12.175,-10.95 -11.525,-10.95 -11.5,-10.925 v1(-11.38,-10.925) ; Cvddd1.1@-12.138,-14.171 -11.362,-14.171 v1(-11.343,-14.152) ; Cvddd2.1@-12.125,-12.5 v1(-11.33,-12.5) ; Clvds2.1@-4.175,-14 Clvds2.1@-4.125,-14 ; Clvds2.1@-3.975,-14.15 Clvds2.1@-4.125,-14 ; v1(-3.725,-14.825) -3.925,-14.625 -3.925,-14.15 -4.075,-14 Clvds2.1@-4.125,-14 ; Clvds1.1@-0.175,-15.05 -0.025,-14.9 Clvds1.1@0.025,-14.9 ; Clvds1.1@-0.025,-14.8 0.074,-14.899 v1(0.074,-15.924) ; Camp2.1@2.725,11.55 2.75,11.525 v1(2.75,10.7) ; v1(5.35,10.2) 5.375,10.225 Uamp2.2@5.375,11.25 ; Camp1.1@11.05,11.7 11.05,10.77 v1(11.078,10.742) ; v1(13.151,10.076) 13.575,10.5 13.8,10.725 13.8,11.175 Uamp1.2@13.85,11.225
  Bottom Layer w0.5: v1@-15.825,-26.75 -15.825,-26.128 v1(-15.794,-26.098) -15.173,-26.098 v1@-15.15,-26.075 ; v1@-15.775,-26.75 -15.75,-26.775 v1@-15.1,-26.775 ; v1@-15.242,-26.658 v1@-15.217,-26.633 ; v1(-15.125,-26.1) -15.1,-26.125 v1@-15.1,-26.775 ; v1@-15.1,-26.875 v1@-15.1,-26.775 ; v1(-15.075,-26.775) -15.025,-26.825 PCI.A11@-15.025,-29.475
Inj: PCI.B36 | length 32.1
  Top Layer w0.125: 1.18,-4.75 1.18,-4.496 1.18,-4.038 1.361,-3.857 3.168,-3.857 3.8,-4.489 3.818,-4.489 4.45,-5.121 4.45,-5.825 11.975,-13.35 PCI.B36@11.975,-29.475
interrupt: PCI.B16 R11.1 | length 28.9
  Top Layer w0.125: PCI.B16@-8.025,-29.475 -8.025,-20.975 R11.1@-7.8,-20.75 ; R11.1@-7.8,-20.775 R11.1@-7.8,-20.75 ; v1(-5.725,-6.725) -7.8,-8.8 R11.1@-7.8,-20.75 ; v1(-3.225,-6.5) -3.221,-6.496 -3.221,-6.171 -2.732,-5.682 -1.768,-5.682 -1.62,-5.83 -1.62,-6.175
  Bottom Layer w0.125: v1(-5.725,-6.725) -5.5,-6.5 v1(-3.225,-6.5)
NetAstropix_chip_47: P1.4 R4.1 | length 34.1
  Top Layer w0.125: -4.8,-1.64 -5.252,-1.64 -5.325,-1.713 -5.325,-2.155 -5.545,-2.375 -6.704,-2.375 -7.05,-2.029 -7.05,2.35 -3.6,5.8 -1.738,5.8 -1.72,5.782 1.86,5.782 1.878,5.8 12.5,5.8 14.7,3.6 R4.1@14.7,3.5 16.31,3.5 P1.4@17,4.19
NetAstropix_chip_59: P1.3 R3.1 | length 35.4
  Top Layer w0.125: -4.8,-0.44 -5.465,-0.44 -5.625,-0.6 -5.625,-1.825 -5.85,-2.05 -6.675,-2.05 -6.775,-1.95 -6.775,2.271 -3.521,5.525 8.75,5.525 12.95,1.325 14.577,1.325 14.65,1.398 R3.1@14.65,2.15 ; R3.1@14.8,2.375 14.925,2.25 15.45,2.25 16.05,1.65 P1.3@17,1.65
NetAstropix_chip_67: P1.2 R2.1 | length 29
  Top Layer w0.125: -6.322,0.36 -5.926,0.36 -5.916,0.35 -5.8,0.35 -5.5,0.65 -5.5,2.93 -4.193,4.238 -0.604,4.238 -0.499,4.132 3.09,4.132 3.195,4.238 9.012,4.238 12.609,0.641 13.459,0.641 14.8,-0.7 R2.1@14.8,-1.2 ; R2.1@14.775,-1.325 14.775,-1.225 R2.1@14.8,-1.2 ; P1.2@16.862,-0.913 16.605,-0.913 16.318,-1.2 R2.1@14.8,-1.2
NetAstropix_chip_77: P1.1 R1.1 | length 30.1
  Top Layer w0.125: -4.8,1.36 -4.526,1.36 -4.511,1.375 -4.373,1.375 -4.3,1.448 -4.3,3.634 -3.947,3.988 -0.708,3.988 -0.603,3.882 3.193,3.882 3.298,3.988 8.488,3.988 12,0.475 12,-2.7 12.85,-3.55 13.8,-3.55 14.387,-2.963 14.487,-2.963 14.775,-2.675 R1.1@14.775,-2.575 15.425,-2.575 16.136,-3.286 16.836,-3.286 P1.1@17.05,-3.5
NetAstropix_chip_84: P2.1 R6.1 | length 30.4
  Top Layer w0.125: 1.52,4.87 1.52,4.542 1.68,4.382 1.96,4.382 2.215,4.638 2.215,4.915 v1@2.275,4.975 ; v1(2.225,6.3) 5.459,6.3 6.253,7.094 15.631,7.094 18.065,4.66 18.065,1.445 20.08,-0.57 20.183,-0.57 20.45,-0.837 R6.1@20.45,-1.375 22.045,-1.375 P2.1@23.025,-0.395 23.12,-0.3 P2.1@23.175,-0.3
  Bottom Layer w0.125: v1(2.225,6.3) 2.225,4.986 2.256,4.955 v1(2.278,4.955)
NetAstropix_chip_94: P2.2 R7.1 | length 25.3
  Top Layer w0.125: 0.52,6.27 0.52,6.544 0.525,6.549 0.525,6.603 0.772,6.85 5.655,6.85 6.149,7.344 15.881,7.344 20.35,2.875 R7.1@20.45,2.875 ; R7.1@20.425,2.825 22.345,2.825 P2.2@23.025,2.145
NetAstropix_chip_104: P2.3 R8.1 | length 25.7
  Top Layer w0.125: -0.475,7.75 -0.475,7.337 -0.313,7.175 5.375,7.175 5.794,7.594 16.506,7.594 19.836,4.264 R8.1@20.375,4.264 ; R8.1@20.375,4.2 22.184,4.2 22.669,4.685 P2.3@23.025,4.685